# Altium PCB Micron-6b.PcbDoc
Units mm, origin at the board's own origin, x right, y up, seen from the top; angles counter-clockwise.
Board outline 45 x 23 mm, 2 copper layers (Top Layer, Bottom Layer), stack 1.021 mm thick; 80 components, 55 nets, 242 pads, 208 vias.
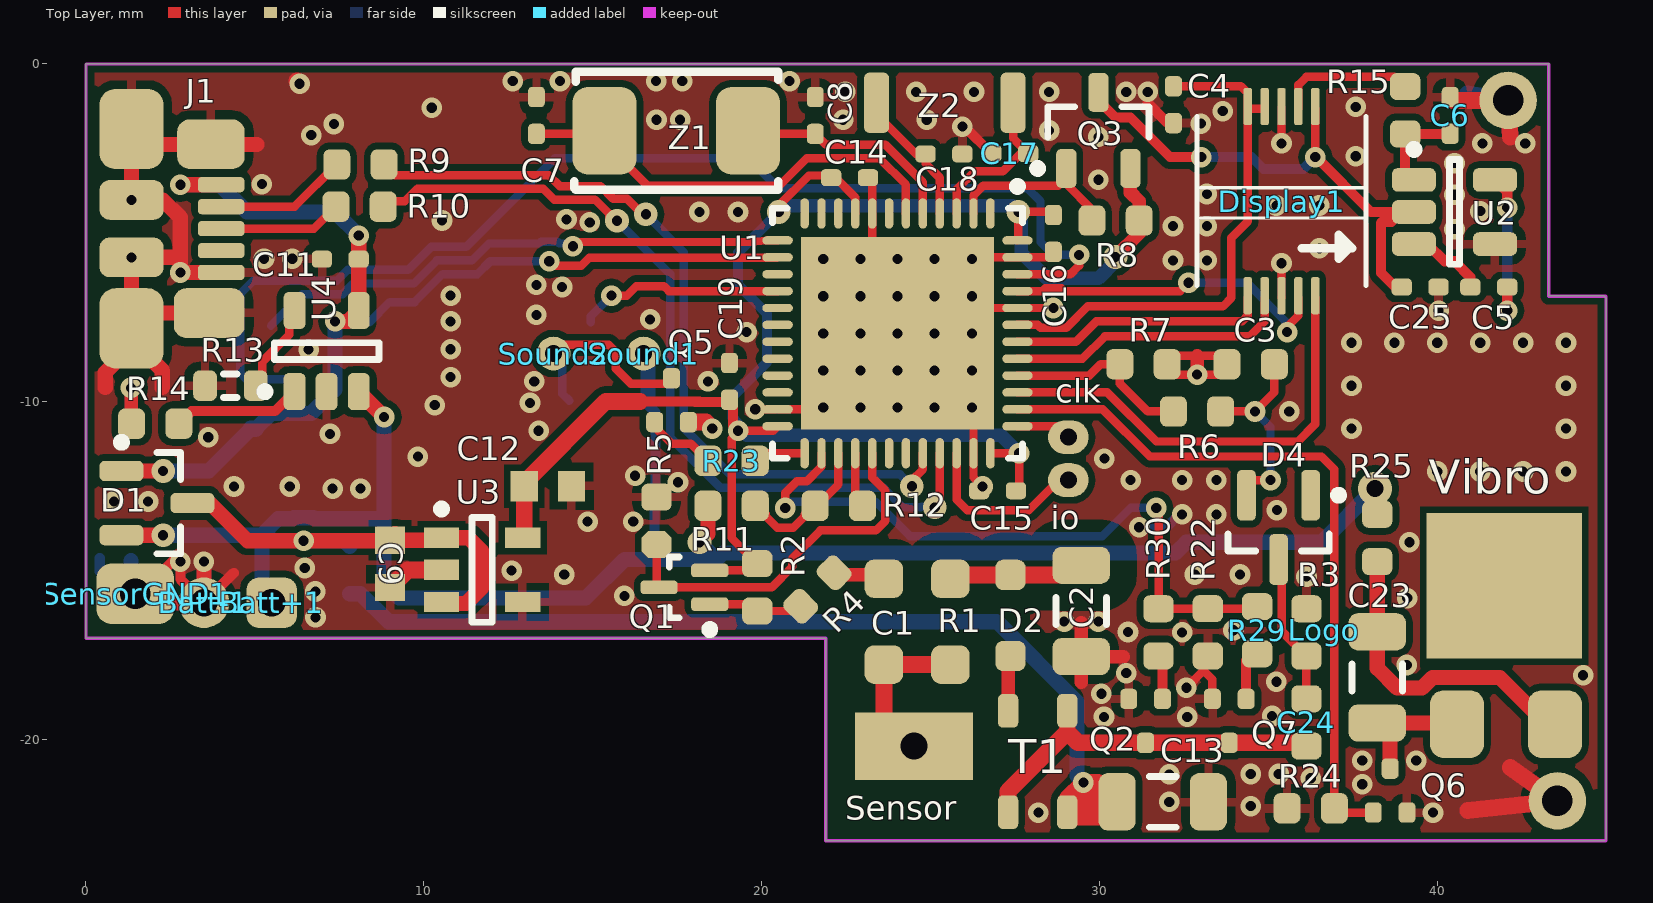
[diagram p0: Top Layer view]
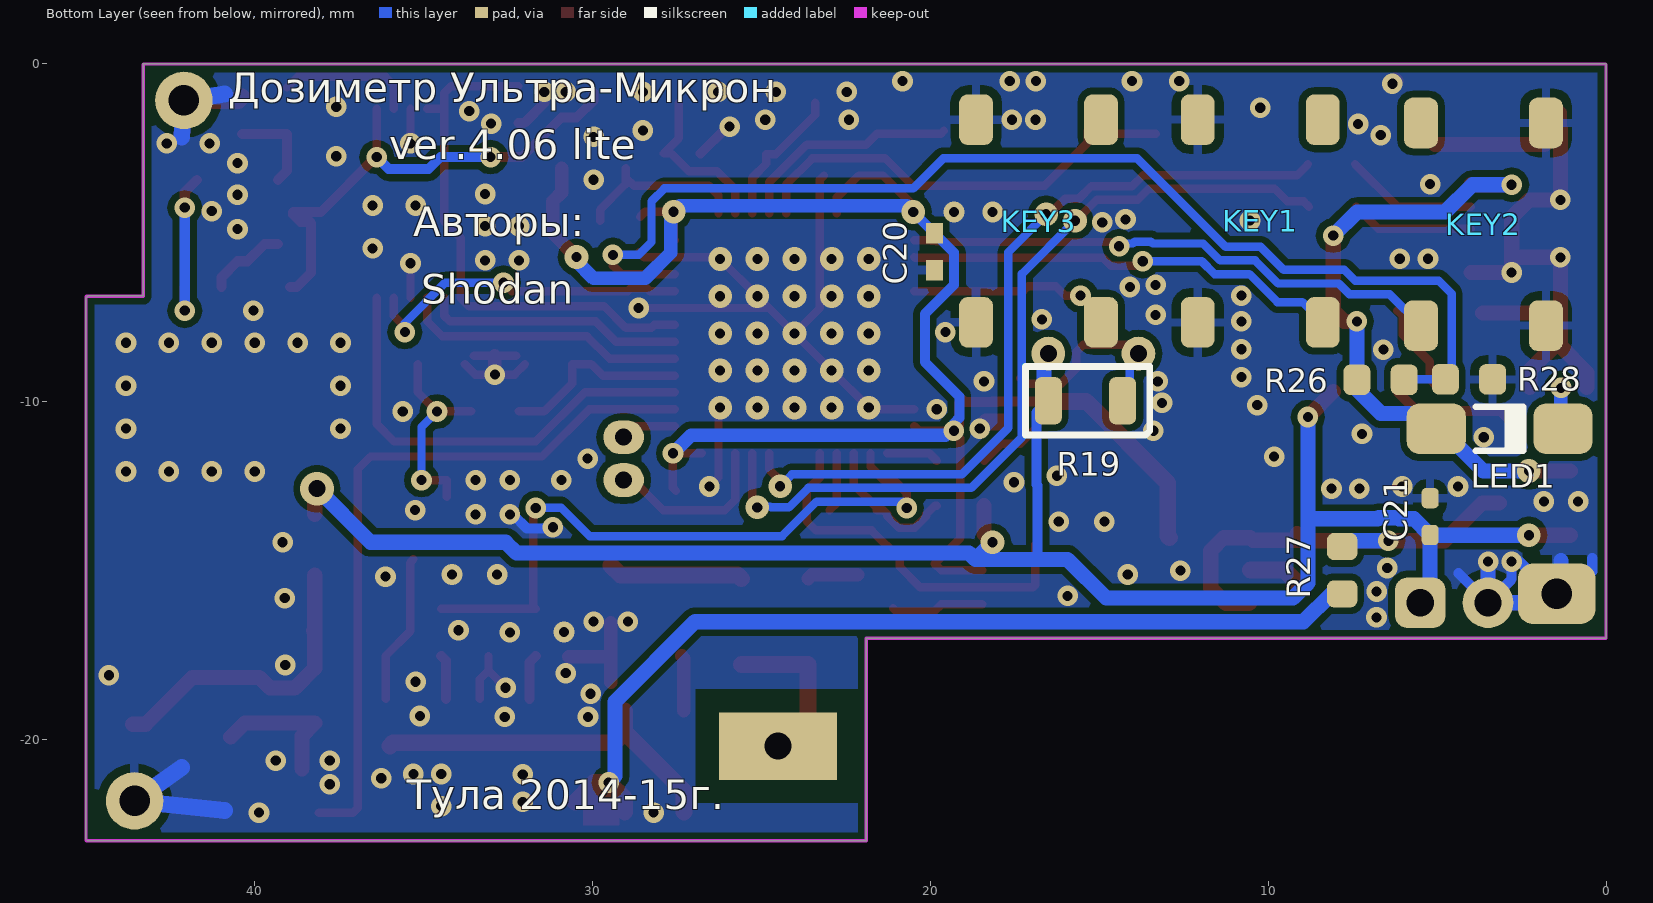
[diagram p1: Bottom Layer view, seen from below]

## Layer stack, top to bottom
Top Solder: solder mask 0.0102, Solder Resist, Dk 3.5
Top Layer: signal copper 0.0356
Dielectric1: dielectric 0.95, FR-4, Dk 4.8
Bottom Layer: signal copper 0.0356
Bottom Solder: solder mask 0.0102, Solder Resist, Dk 3.5

## Board outline
0,0 0,-17 21.882,-17 21.9,-17.018 21.9,-22.993 21.907,-23 44.958,-23 45,-22.958 45,-22.924 45,-6.921 44.958,-6.879 44.958,-6.875 44.941,-6.858 43.307,-6.858 43.307,0

## Design rules (kind name [scope] priority, off if disabled: settings)
AssemblyTestPointUsage SilkToBoardRegionClearance_1 [All] p2:
Clearance Clearance_NetD2_1 [InNet('NetD2_1')] p1: gap=0.7
Clearance Clearance_NetC1_2 [InNet('NetC1_2')] p2: gap=0.7
Clearance Clearance_NetC1_1 [InNet('NetC1_1')] p3: gap=0.6
Clearance Clearance_400V [InNet('+400V')] p4: gap=0.8
Clearance Clearance_poly [InPolygon] p5: gap=0.2
Clearance [All] p6: gap=0.152
MatchedLengths DiffPair_DIFF100MatchedLengths [InDifferentialPairClass('DIFF100')] p1: tolerance=0.152 checknetsindiffpair=TRUE checkdiffpairvsdiffpair=FALSE checkothers=FALSE
MinimumAnnularRing [All] p1: minimumring=0.152
MinimumSolderMaskSliver SilkscreenOverComponentPads_1 [All] p1: minsoldermaskwidth=0.254
MinimumSolderMaskSliver SilkToSolderMaskClearance [IsPad] p2: minsoldermaskwidth=0.254
MinimumSolderMaskSliver [All] p3: minsoldermaskwidth=0.254
MinimumSolderMaskSliver SilkscreenOverComponentPads_2 [All] p4: minsoldermaskwidth=0.254
PolygonConnect PolygonConnect_via [IsVia] p1: connectstyle=Direct reliefconductorwidth=0.254 reliefentries=4 polygonreliefangle="90 Angle" airgapwidth=0.254
PolygonConnect [All] p2: connectstyle=Relief reliefconductorwidth=0.254 reliefentries=4 polygonreliefangle="90 Angle" airgapwidth=0.254
RoutingVias [All] p1: holewidth=0.305 width=0.635 viastyle="Through Hole" minholewidth=0.305 minwidth=0.635 maxholewidth=0.711 maxwidth=1.27
ShortCircuit ShortCircuit_1 [All] p1: allowed=FALSE
ShortCircuit [All] p2: allowed=FALSE
SilkToBoardRegionClearance SilkToBoardRegionClearance_2 [All] p1:
SilkToBoardRegionClearance [All] p2:
SilkToSilkClearance [All] p1: silktosilkclearance=0.152
SilkToSolderMaskClearance SilkToSolderMaskClearance_1 [IsPad] p1: minsilkscreentomaskgap=0.254 clearancetoexposedcopper=TRUE
SilkToSolderMaskClearance SilkscreenOverComponentPads [IsPad] p2: minsilkscreentomaskgap=0.1 clearancetoexposedcopper=TRUE
SolderMaskExpansion [All] p1: expansion=0.102
Width [All] p1: maxlimit=2.54 minlimit=0.152 preferedwidth=0.254
25 further rules are at their usual default settings.

## Components (designator, comment, footprint, x,y, rotation, side; value= is the part's Value field where it differs from the comment)
Batt+1 "" "SENSOR CONTACT"#1 5.125,-17.725 r90 top
Batt-1 "" "SENSOR CONTACT"#2 3.492,-15.95 r90 top
C1 "10pF 1kV" "0805 SW-2012 STD" 23.622,-14.986 r270 top
C2 "10nF 600V" C1206 29.464,-16.192 r90 top
C3 "470pF" 1608[0603]#1 34.48,-8.89 r180 top
C4 "100nF" "0402 AVX"#1 32.194,-1.206 r0 top
C5 "1uF" "0402 AVX"#1 41.529,-6.604 r270 top
C6 "1uF" "0402 AVX"#1 40.386,-1.524 r0 top
C7 "18pF" "0402 AVX"#1 13.335,-1.524 r0 top
C8 "18pF" "0402 AVX"#1 21.59,-1.524 r180 top
C9 "1uF" 1608[0603]#2 9,-14.8 r90 top
C11 "1uF" "0402 AVX"#1 7.53,-5.779 r90 top
C12 "1uF" 1608[0603]#2 13.675,-12.5 r180 top
C13 "10uF" C1206 31.877,-21.844 r180 top
C14 "100nF" "0402 AVX"#2 22.606,-3.365 r270 top
C15 "100nF" "0402 AVX"#1 26.987,-12.636 r270 top
C16 "100nF" "0402 AVX"#1 28.639,-5.016 r0 top
C17 "10pF" "0402 AVX"#1 27.35,-2.65 r90 top
C18 "10pF" "0402 AVX"#1 25.4,-2.667 r270 top
C19 "100nF" "0402 AVX"#1 19.05,-9.398 r180 top
C20 "1uF" "0402 AVX"#3 19.875,-5.56 r180 bottom
C21 "1uF" "0402 AVX"#1 5.207,-13.399 r180 bottom
C23 "4u7" C1206 38.227,-18.161 r90 top
C24 "33nF" 1608[0603]#1 36.131,-19.494 r90 top
C25 "100nF" "0402 AVX"#1 39.497,-6.604 r90 top
clk "" "SENSOR CONTACT"#3 29.083,-11.049 r90 top
D1 "BAR43C" SOT23_N 2.1,-13 r0 top
D2 "DA2JF8100L" DA2JF8100L 27.368,-17.526 r90 top
D4 "BAV99" SOT23-3 35.306,-13.718 r270 top
Display1 "Nokia 2760" DF23C-10DS-0.5V 32.893,-1.46 r90 top
io "" "SENSOR CONTACT"#3 29.083,-12.319 r90 top
J1 "Micro-USB" 47346-0001 4.75,-4.875 r270 top
KEY1 "Menu" IT-1187-160GM-G 12.087,-1.65 r270 bottom locked
KEY2 "UP" IT-1187-160GM-G 1.778,-7.747 r90 bottom
KEY3 "DOWN" IT-1187-160GM-G 18.65,-1.65 r270 bottom locked
LED1 "KPTD-3216SECK" KPTD-3216SECK 3.15,-10.8 r0 bottom
Logo "" "Logo Micron" 36.639,-16.764 r0 top
Q1 "BC857CT" SOT416_N 17.716,-15.494 r180 top
Q2 "RUM002N05T2L" PMR400UN 31.369,-18.796 r90 top
Q3 "IRLML6401" Micro3_N 29.972,-1.968 r90 top
Q5 "RUM002N05T2L" PMR400UN 17.335,-10.604 r270 top
Q6 "RUM002N05T2L" PMR400UN 38.608,-22.162 r270 top
Q7 "RUM002N05T2L" PMR400UN 33.846,-18.796 r90 top
R1 "10M 400V" "0805 SW-2012 STD" 25.59,-18.034 r90 top
R2 "1.5k" 1608[0603]#1 19.875,-15.494 r270 top
R3 "10k" 1608[0603]#1 36.131,-16.828 r270 top
R4 "10K" 1608[0603]#1 21.653,-15.557 r225 top
R5 "10k" 1608[0603]#3 16.891,-13.525 r90 top
R6 "33K" 1608[0603]#1 32.893,-10.287 r180 top
R7 "1k" 1608[0603]#1 31.305,-8.89 r180 top
R8 "10k" 1608[0603]#1 30.48,-4.635 r0 top
R9 "22R" 1608[0603]#1 8.125,-2.975 r180 top
R10 "22R" 1608[0603]#1 8.1,-4.225 r180 top
R11 "10k" 1608[0603]#1 19.113,-13.081 r180 top
R12 "10k" 1608[0603]#1 22.288,-13.081 r180 top
R13 "62K" J1-0603 4.275,-9.525 r0 top
R14 "470R" 1608[0603]#1 2.05,-10.65 r180 top
R15 "1R" 1608[0603]#1 39.052,-1.369 r270 top
R19 "360R" RESISTOR 15.41,-9.97 r180 bottom
R22 "10K" 1608[0603]#1 33.211,-16.826 r90 top
R23 "1k" 1608[0603]#1 19.113,-11.747 r0 top
R24 "10k" 1608[0603]#1 36.258,-22.034 r0 top
R25 "15R" 1608[0603]#1 38.227,-14.034 r270 top
R26 "1k" 1608[0603]#1 6.675,-9.35 r0 bottom
R27 "22R" 1608[0603]#1 7.81,-14.986 r270 bottom
R28 "1.5k" 1608[0603]#1 4.056,-9.335 r180 bottom
R29 "0R" 1608[0603]#1 34.671,-16.764 r90 top
R30 "0R" 1608[0603]#1 31.75,-16.828 r90 top
Sensor "" "Sensor contact" 24.511,-20.193 r90 top
SensorGND1 "" "SENSOR CONTACT"#4 1.46,-15.684 r180 top
Sound1 "" "SENSOR CONTACT"#5 16.51,-8.572 r90 top
Sound2 "" "SENSOR CONTACT"#5 13.843,-8.572 r90 top
T1 "ATB322515-0110" ATB322515-0110 27.3,-22.15 r90 top
U1 "STM32L152CBU6" UFQFPN48_M 24.025,-7.975 r270 top
U2 "TPS60400DBV" SOT-23-OT5_M 40.513,-4.381 r0 top
U3 "TPS78330DDCR" TI-DDC5_N 11.725,-14.975 r0 top
U4 "MCP73831T-2ACI/OT" SOT-23-OT5_N 7.125,-8.5 r90 top
Vibro "Motor" "Vibro 4hobby" 39.688,-13.144 r270 top
Z1 "8MHZ" 8MHZ 16.9,-1.875 r180 top
Z2 "32,768 KHz" ABS10 22.975,-0.25 r0 top

## Footprints (in the part's own frame and the unit in brackets; to place one, negate y for a bottom-side part, rotate by r counter-clockwise, add the part's x,y. Pads: shape width x height; smd on the part's side, far side on the other; paste and mask are expansions set on the pad)
8MHZ [mm]
  rrect50% 1.9x2.6 smd: 1(-2.7,0.1) 2(1.55,0.1)
  silkscreen extent -3.6,-1.65 2.45,1.85, body extent -3.6,-1.65 2.4,1.85, height 1.4
"0402 AVX"#1 [mm]
  rrect50% 0.5x0.6 smd: 1(0,0.545) 2(0,-0.545)
  body extent -0.25,-0.48 0.25,0.52, height 0.56
"0402 AVX"#2 [mm]
  rrect50% 0.5x0.6 smd: 1(0,-0.545) 2(0,0.545)
  body extent -0.25,-0.52 0.25,0.48, height 0.56
"0402 AVX"#3 [mm]
  rect 0.5x0.6 smd: 1(0,0.545) 2(0,-0.545)
  body extent -0.25,-0.48 0.25,0.52, height 0.56
"0805 SW-2012 STD" [mil] "Chip Capacitor, 2-Leads, Body 1,00x0,50mm, IPC Medium Density"
  rrect50% 45x45 smd: 1(10,0) 2(110,0)
  body extent 18,-20 103,20, height 39
1608[0603]#1 [mm] "Chip Capacitor, Body 1.6x0.8mm, IPC High Density"
  rrect50% 0.8x0.9 smd: 1(-0.7,0) 2(0.7,0)
  body extent -0.87,-0.48 0.87,0.48, height 1.3
1608[0603]#2 [mm] "Chip Capacitor, Body 1.6x0.8mm, IPC High Density"
  rect 0.8x0.9 smd: 1(-0.7,0) 2(0.7,0)
  body extent -0.87,-0.48 0.87,0.48, height 1.3
1608[0603]#3 [mm] "Chip Capacitor, Body 1.6x0.8mm, IPC High Density"
  oct 0.8x0.9 smd: 1(-0.7,0)
  rrect50% 0.8x0.9 smd: 2(0.7,0)
  body extent -0.87,-0.48 0.87,0.48, height 1.3
47346-0001 [mm] "Molex Mico-USB"
  rrect50% 0.45x1.38 smd: 1(-1.3,-0.75) 2(-0.65,-0.75) 3(0,-0.75) 4(0.65,-0.75) 5(1.3,-0.75)
  rrect50% 1.475x2 smd: MH1(-2.5,-1.05)
  rrect50% 1.475x2.1 smd: MH2(2.5,-1.1)
  rrect50% 2.375x1.9 smd: MH3(-2.95,-3.4) MH4(2.95,-3.4)
  rrect50% 1.175x1.9 smd: MH3(-0.85,-3.4) MH4(0.85,-3.4)
  body extent -3.95,-5.52 4.03,-0.09, height 2.77
ABS10 [mm]
  rrect50% 0.75x1.8 smd: 1(0.43,-0.9) 2(4.47,-0.9)
  body extent 0,-1.8 4.9,0, height 1
ATB322515-0110 [mm]
  rrect50% 1x0.6 smd: 1(0,-1.75) 2(0,0) 3(3,0) 4(3,-1.75)
  body extent -0.1,-2.15 3.1,0.35, height 1.55
C1206 [mm] "Chip Capacitor, Body 3.2x1.6mm, IPC High Density"
  rrect50% 1.1x1.7 smd: 1(-1.35,0) 2(1.35,0)
  silkscreen extent -0.4,-0.75 0.4,0.75, body extent -1.7,-0.9 1.7,0.9, height 1.3
DA2JF8100L [mm]
  rrect50% 0.9x0.9 smd: 1(0,0) 2(2.4,0)
  body extent 0.36,-0.65 2.06,0.6, height 0.7
DF23C-10DS-0.5V [mm]
  rrect50% 1.1x0.25 smd: 1(-5.4,-1.5) 2(-5.4,-2) 3(-5.4,-2.5) 4(-5.4,-3) 5(-5.4,-3.5) 6(0.2,-3.5) 7(0.2,-3) 8(0.2,-2.5) 9(0.2,-2) 10(0.2,-1.5)
  silkscreen extent -5.1,-5 -0.1,0, body extent -5.1,-5 -0.1,0, height 1.4
IT-1187-160GM-G [mm]
  rrect50% 1.5x1 smd: 3(0,0) 3(6,0) 4(0,3.7) 4(6,3.7)
  body extent 0.4,-0.7 5.6,4.5, height 1.5
J1-0603 [mm] "Chip Resistor, Body 1.6x0.8mm, IPC High Density"
  rrect50% 0.7x0.9 smd: 1(-0.75,0) 2(0.75,0)
  silkscreen extent -0.2,-0.35 0.2,0.35, body extent -0.85,-0.48 0.85,0.48, height 0.9
KPTD-3216SECK [mm] "Chip Capacitor, 2-Leads, Body 3,2x1,6mm, IPC Medium Density"
  rrect50% 1.75x1.5 smd: 1(-1.875,0) 2(1.875,0)
  silkscreen extent -0.7,-0.65 0.7,0.65, body extent -1.6,-0.8 1.6,0.8, height 1.8
"Logo Micron" [mm]
Micro3_N [mm] "SOT23, 3-Leads, Body 2.9x1.3mm, Pitch 0.95mm, Lead Span 2.3mm, IPC Medium Density"
  rrect50% 1.15x0.6 smd: 1(-1.125,0.95) 2(-1.125,-0.95) 3(1.125,0)
  silkscreen extent -1.25,-1.5 0.7,1.92, body extent -0.7,-1.5 0.7,1.5, height 1.12
PMR400UN [mm]
  rrect50% 0.6x0.5 smd: 1(0,-0.5) 2(0,0.5) 3(-1.3,0)
  body extent -1.15,-0.9 -0.25,0.9, height 0.95
RESISTOR [mm]
  rrect50% 0.8x1.4 smd: 1(-1.1,0) 2(1.1,0)
  silkscreen extent -1.78,-1.02 1.91,1.02, body extent -1.1,-0.7 1.2,0.7, height 1
"SENSOR CONTACT"#1 [mm]
  rrect50% 1.5x1.5 hole 0.8: 1(1.775,-0.375)
"SENSOR CONTACT"#2 [mm]
  round 1.5 hole 0.8: 1(0,0)
"SENSOR CONTACT"#3 [mm]
  oval 1x1.2 hole 0.5: 1(0,0)
"SENSOR CONTACT"#4 [mm]
  rrect50% 2.3x1.8 hole 0.9: 1(0,0)
"SENSOR CONTACT"#5 [mm]
  round 1 hole 0.5: 1(0,0)
"Sensor contact" [mm]
  rect 2x3.5 hole 0.8: 1(0,0)
SOT23-3 [mm] "SOT23, 3-Leads, Body 2,90x2,45mm, Pitch 0,95mm, IPC Medium Density"
  rrect50% 1.5x0.55 smd: 1(-0.95,0.95) 2(-0.95,-0.95) 3(0.95,0)
  silkscreen extent -1.07,-1.5 0.7,1.9, body extent -0.7,-1.5 0.7,1.5, height 1.1
SOT23_N [mm] "SOT23, 3-Leads, Body 2.9x1.3mm, Pitch 0.95mm, Lead Span 2.3mm, IPC Medium Density"
  rrect50% 1.3x0.6 smd: 1(-1.05,0.95) 2(-1.05,-0.95) 3(1.05,0)
  silkscreen extent -1.17,-1.5 0.7,1.92, body extent -0.7,-1.5 0.7,1.5, height 1.1
SOT416_N [mm] "SOT416, 3-Leads, Body 1.6x0.8mm, Pitch 0.50mm, Lead Span 1.6mm, IPC Medium Density"
  rrect50% 1.1x0.4 smd: 1(-0.75,0.5) 2(-0.75,-0.5) 3(0.75,0)
  silkscreen extent -0.87,-0.9 0.45,1.37, body extent -0.45,-0.9 0.45,0.9, height 0.95
SOT-23-OT5_M [mm] "SOT23, 5-Leads, Body 2.9x1.6mm, Pitch 0.95mm, Lead Span 2.7mm, IPC Low Density"
  rrect50% 1.3x0.7 smd: 1(-1.2,0.95) 2(-1.2,0) 3(-1.2,-0.95) 4(1.2,-0.95) 5(1.2,0.95)
  silkscreen extent -1.32,-1.55 0.15,1.97, body extent -0.9,-1.55 0.9,1.55, height 1.45
SOT-23-OT5_N [mm] "SOT23, 5-Leads, Body 2.9x1.6mm, Pitch 0.95mm, Lead Span 2.7mm, IPC Medium Density"
  rrect50% 1.1x0.65 smd: 1(-1.2,0.95) 2(-1.2,0) 3(-1.2,-0.95) 4(1.2,-0.95) 5(1.2,0.95)
  silkscreen extent -1.32,-1.55 0.25,1.95, body extent -0.9,-1.55 0.9,1.55, height 1.45
TI-DDC5_N [mm] "SOT23, 5-Leads, Body 2.9x1.6mm, Pitch 0.95mm, IPC Medium Density"
  rect 1.05x0.6 smd: 1(-1.2,0.95) 2(-1.2,0) 3(-1.2,-0.95) 4(1.2,-0.95) 5(1.2,0.95)
  silkscreen extent -1.32,-1.55 0.3,1.92, body extent -0.87,-1.52 0.87,1.53, height 1.1
UFQFPN48_M [mm] "QFN, 48-Leads, Body 7x7mm, Pitch 0.5mm, Thermal Pad 5.6x5.6mm, IPC Low Density"
  oval 0.9x0.25 smd: 1(-3.55,2.75) 2(-3.55,2.25) 3(-3.55,1.75) 4(-3.55,1.25) 5(-3.55,0.75) 6(-3.55,0.25) 7(-3.55,-0.25) 8(-3.55,-0.75) 9(-3.55,-1.25) 10(-3.55,-1.75) 11(-3.55,-2.25) 12(-3.55,-2.75) 25(3.55,-2.75) 26(3.55,-2.25) 27(3.55,-1.75) 28(3.55,-1.25) 29(3.55,-0.75) 30(3.55,-0.25) 31(3.55,0.25) 32(3.55,0.75) 33(3.55,1.25) 34(3.55,1.75) 35(3.55,2.25) 36(3.55,2.75)
  oval 0.25x0.9 smd: 13(-2.75,-3.55) 14(-2.25,-3.55) 15(-1.75,-3.55) 16(-1.25,-3.55) 17(-0.75,-3.55) 18(-0.25,-3.55) 19(0.25,-3.55) 20(0.75,-3.55) 21(1.25,-3.55) 22(1.75,-3.55) 23(2.25,-3.55) 24(2.75,-3.55) 37(2.75,3.55) 38(2.25,3.55) 39(1.75,3.55) 40(1.25,3.55) 41(0.75,3.55) 42(0.25,3.55) 43(-0.25,3.55) 44(-0.75,3.55) 45(-1.25,3.55) 46(-1.75,3.55) 47(-2.25,3.55) 48(-2.75,3.55)
  rect 5.7x5.7 smd: 49(0,0)
  silkscreen extent -4.47,-3.7 3.7,3.7, body extent -3.55,-3.55 3.55,3.55, height 0.6
"Vibro 4hobby" [mm] "EBAY zxdima"
  rrect50% 2x1.6 smd: 1(6.4,3.8) 2(6.4,0.9)
  rect 4.3x4.6 smd: GND(2.3,2.3)
  body extent -3.95,0 7.4,4.7, height 5

## Part data
Batt+1 Batt-1 clk io Logo Sensor SensorGND1 Sound1 Sound2: library part Plug, "Plug"
C1 C2 C3 C4 C5 C6 C7 C8 C11 C13 C14 C15 C16 C17 C18 C19 C20 C21 C24 C25: library part "Cap Semi", "Capacitor (Semiconductor SIM Model)"
C9 C12 C23: library part CAPACITOR, "Capacitor (Semiconductor SIM Model)"
D1: library part BAT54C, "Schottky Barrier Double Diode"
D2: library part Diode, "Default Diode"
D4: "Silicon Switching Diode Array for High-Speed Switching"
J1: library part 0481900001, "USB On-The-Go (OTG) Mini-B Receptacle, Right Angle, SMT, 0.80mm (.031\") Pitch, Solder Tabs with Back Cover, Recessed Type"
KEY1 KEY2 KEY3: library part Micro_key_smd
Q1: "PNP General-purpose Transistor"
Q2 Q5 Q6 Q7: library part IRLML2402, "HEXFET Power MOSFET"
Q3: "HEXFET Power MOSFET"
R1 R2 R3 R4 R5 R6 R7 R8 R9 R10 R11 R12 R14 R15 R19 R22 R23 R24 R25 R26 R27 R28 R29 R30: library part "Resistor 0805"
R13: library part Res3, "Resistor"
U2: library part TPS60400
U3: "Single Output LDO, 150 mA, Fixed 3 V Output, 2.2 to 5.5 V Input, with Ultra-Low IQ, 5-pin SOT (DDC), -40 to 105 degC, Green (RoHS & no Sb/Br)"
U4: "Miniature Single-Cell, Fully Integrated Li-Ion, Li-Polymer Charge Management Controller, 4.2V, 5-Pin SOT-23, Industrial Temperature, Tape and Reel"
Vibro: "Motor, General Kind"
Z2: library part 8MHZ

## Free pads (board coordinates)
  round 1.7 hole 0.9: 0(42.1,-1.079) 0(43.561,-21.816)

## Via types
v1: diameter 0.61, hole 0.3, Top Layer to Bottom Layer, tented both sides, 172 vias
v2: diameter 0.7, hole 0.3, Top Layer to Bottom Layer, tented both sides, 35 vias
v3: diameter 1, hole 0.5, Top Layer to Bottom Layer, tented both sides, 1 vias

## Nets (pads, with @x,y where several pads share a name; then routed paths per layer and width w, separated by ;. In a path a pad name is that pad's centre, name@x,y a point inside that pad or via, vN(x,y) a via of type N, cw(c..) or ccw(c..) an arc to the next point about the centre after c; other vN are vias at no path point)
+3V: C12.2 C14.1 C15.1 C16.1 C19.1 C20.1 Q1.2 Q3.2 R2.1 R8.2 U1.9 U1.24 U1.36 U1.48 U3.5 | length 55.1
  Top Layer w0.25: Q1.2 19.676,-14.994 R2.1 19.113,-14.032 v1@19.113,-11.078 ; v1(19.304,-10.858) 20.341,-10.858 U1.24 ; v2(20.511,-4.381) 20.511,-4.191 21.4,-3.302 22.124,-3.302 22.775,-3.952 U1.9 ; U1.36 v1(27.622,-11.525) 27.622,-12.547 C15.1 ; U1.48 27.601,-5.199 v2(27.601,-4.375) 28.445,-4.375 C16.1@28.59,-4.52
  Top Layer w0.3: 16.405,-9.989 18.014,-9.989 18.025,-10 18.158,-10 18.163,-10.005 18.988,-10.005 C19.1 19.149,-10.042 19.149,-10.704 v1(19.304,-10.858)
  Top Layer w0.4: v2(30.48,-5.715) 31.18,-5.015 R8.2 31.18,-4.066 30.922,-3.807 Q3.2
  Top Layer w0.5: U3.5 12.975,-13.975 C12.2 12.975,-12.4 15.386,-9.989 16.405,-9.989
  Bottom Layer w0.3: v1(19.304,-10.858) 19.304,-10.635 19.143,-10.474 19.143,-9.844 20.165,-8.822 20.165,-7.402 19.304,-6.54 19.304,-5.588 v2(20.511,-4.381)
  Bottom Layer w0.4: v1@19.558,-10.986 27.083,-10.986 v1(27.622,-11.525) ; v2(20.511,-4.381) 20.701,-4.191 27.417,-4.191 v2(27.601,-4.375) 27.686,-4.46 27.686,-5.588 28.448,-6.35 29.972,-6.35 30.48,-5.842 v2(30.48,-5.715)
+5: C11.2 D1.1 J1.1 LED1.2 R26.2 U4.4 | length 19.5
  Top Layer w0.45: D1.1 v2(2.286,-12.05) ; v1(2.794,-3.575) J1.1 ; v1(7.375,-7.62) 7.755,-7.62 U4.4 C11.2 v1(8.075,-5.08)
  Bottom Layer w0.45: v2(2.286,-12.05) 3.635,-12.05 LED1.2@4.884,-10.8 ; v1(2.794,-3.575) 3.956,-3.575 4.763,-4.381 7.376,-4.381 v1(8.075,-5.08) ; LED1.2 5.475,-10.351 6.667,-10.351 7.375,-9.643 R26.2 v1(7.375,-7.62)
  Bottom Layer w0.5: LED1.2@4.884,-10.8 LED1.2
+400V: C2.2 D2.2 R1.2 | length 4
  Top Layer w0.5: R1.2 25.705,-15.126 D2.2 29.181,-15.126 C2.2
+DATA: J1.3 R10.2 | length 3.7
  Top Layer w0.25: J1.3 6.75,-4.875 R10.2
+LED: C25.1 Display1.6 Q3.3 U2.2 | length 15.2
  Top Layer w0.25: Display1.6@36.393,-1.324 v1(36.393,-2.757) v1@36.418,-2.757
  Top Layer w0.3: Q3.3 29.972,-1.079 30.48,-1.587 30.924,-1.587 32.094,-2.757 32.195,-2.757 v1(33.02,-2.757) ; v1@36.418,-2.757 38.043,-4.381 38.862,-4.381 38.862,-4.458 38.641,-4.679 38.361,-4.679 38.335,-4.704 38.335,-6.184 38.756,-6.604 C25.1
  Bottom Layer w0.3: v1(33.02,-2.757) 34.507,-2.757 34.861,-3.111 36.039,-3.111 v1(36.393,-2.757)
-3V: Display1.7 R15.1 | length 4.1
  Top Layer w0.25: Display1.7@35.893,-1.324 35.893,-0.619 36.131,-0.381 38.737,-0.381 R15.1@39.053,-0.697
-DATA: J1.2 R9.2 | length 3.9
  Top Layer w0.25: J1.2 6.175,-4.225 R9.2
BAT: Batt+1.1 C21.2 D1.2 R11.2 R19.1 R25.1 Sound1.1 U4.3 | length 56
  Top Layer w0.45: D1.2 v2(2.286,-13.95) ; U4.3 v1(8.826,-10.452) ; v2(18.161,-14.16) 18.413,-13.908 R11.2 ; v3(38.163,-12.573) 38.227,-12.637 R25.1
  Bottom Layer w0.3: R19.1 16.863,-10.323 16.863,-12.444 16.828,-12.479 16.828,-14.668
  Bottom Layer w0.45: v2(2.286,-13.95) C21.2@5.207,-13.95 ; Batt+1.1 5.207,-15.657 C21.2@5.207,-13.95 ; v1(8.826,-10.452) 8.826,-13.462 ; R19.1 16.637,-9.842 16.637,-8.7 Sound1.1 ; v2(18.161,-14.16) 18.669,-14.668 ; v3(38.163,-12.573) 36.576,-14.16 32.575,-14.16 32.256,-14.48 24.184,-14.48 24.182,-14.478 18.86,-14.478 18.669,-14.668 ; C21.2@5.207,-13.95 C21.2 5.688,-13.462 6.132,-13.462 6.163,-13.431 6.728,-13.431 6.759,-13.462 8.826,-13.462 ; 8.826,-13.462 8.826,-15.367 9.271,-15.811 14.795,-15.811 15.938,-14.668 18.669,-14.668
CLK: clk.1 U1.37 | length 1.6
  Top Layer w0.25: U1.37 28.759,-10.725 clk.1
GND: Batt-1.1 C2.1 C3.2 C4.2 C6.1 C7.1 C8.2 C9.1 C11.1 C12.1 C13.1 C14.2 C15.2 C16.2 C17.1 C18.1 C19.2 C20.2 C21.1 C25.2 Display1.3 Display1.8 J1.5 J1.MH1 J1.MH2 J1.MH3 J1.MH4 KEY1.3 KEY2.3 KEY3.3 pad.0 Q2.2 Q5.2 Q6.2 Q7.2 R3.1 R5.2 R7.1 R13.1 R22.1 R24.1 R28.2 SensorGND1.1 U1.8 U1.23 U1.35 U1.44 U1.47 U1.49 U2.4 U3.2 U3.4 U4.2 | length 93.7
  Top Layer w0.25: U1.23 21.775,-10.225 v2(21.825,-10.175) v2(22.925,-9.075) v2(24.025,-7.975) ; C14.2@23.151,-3.302 23.275,-3.426 U1.8 23.275,-7.225 v2(24.025,-7.975) ; U1.49@26.275,-10.225 U1.35 26.275,-12.241 v1(26.543,-12.509) ; C16.2@28.625,-5.575 28.475,-5.725 U1.47 26.275,-5.725 v2(26.225,-5.775) v2(25.125,-6.875) U1.49@24.775,-7.225 ; v1(28.639,-7.225) U1.44 U1.49@24.775,-7.225 ; R7.1 32.31,-9.195 v1(32.893,-9.195) 33.476,-9.195 C3.2 ; R7.1@32.26,-8.636 32.893,-8.636 C3.2@33.526,-8.636 ; v1(32.575,-18.466) 33.084,-17.958 ; R22.1@33.084,-17.526 33.084,-17.958 ; Q7.2 33.345,-18.22 33.084,-17.958 ; Display1.3@35.393,-6.924 v1(35.393,-5.899) ; v1(35.393,-2.349) Display1.8@35.393,-1.324 ; v2(24.025,-7.975) U1.49@24.775,-7.225
  Top Layer w0.3: SensorGND1.1@1.333,-15.95 v1@2.552,-14.732 ; v1(2.794,-14.732) 2.794,-15.252 Batt-1.1 4.378,-15.065 ; v1(25.946,-1.854) 26.009,-1.854 C17.1 ; v1(31.432,-0.826) 31.432,-1.156 32.028,-1.751 C4.2
  Top Layer w0.4: J1.MH3@1.35,-1.925 J1.MH3@1.35,-1.447 ; v1@28.511,-2.069 v1(28.511,-1.968) ; 29.464,-18.31 C2.1 ; 29.464,-16.542 C2.1 ; 30.708,-17.542 C2.1 ; v1(32.893,-9.195) 32.893,-8.636
  Top Layer w0.45: 0.572,-9.576 0.572,-9.131 1.35,-8.353 J1.MH4@1.35,-7.825 ; SensorGND1.1@1.333,-15.95 Batt-1.1 v1@3.492,-14.77 ; 2.261,-9.576 2.261,-9.08 1.35,-8.17 J1.MH4@1.35,-7.825 ; 2.791,-5.725 v1(1.35,-5.725) J1.MH4@1.35,-7.825 ; J1.MH2 1.8,-7.375 J1.MH4@1.35,-7.825 ; J1.5 v1(2.794,-6.175) 2.794,-4.547 2.272,-4.025 v1(1.35,-4.025) 1.35,-1.925 1.812,-2.387 3.7,-2.387 5.066,-2.387
  Top Layer w0.5: v1@6.248,-0.508 v1(6.325,-0.584) ; C9.1 9.525,-14.975 U3.2 ; Q5.2 18.351,-10.604 v1(18.542,-10.795) ; C6.1 40.487,-1.079 42.1,-1.079 42.164,-2.159 ; 40.907,-22.098 pad.0@43.561,-21.816 ; 42.164,-20.828 pad.0@43.561,-21.816 ; pad.0@43.434,-22.098 pad.0@43.561,-21.816
  Bottom Layer w0.3: 0.406,-14.63 0.406,-15.023 1.333,-15.95 2.552,-14.732 v1(2.794,-14.732) 2.794,-15.252 Batt-1.1 4.368,-15.075 ; v1(31.178,-13.716) 31.219,-13.756 31.939,-13.756 32.36,-13.335 v1(32.448,-13.335)
  Bottom Layer w0.45: 1.333,-14.707 1.333,-15.95 Batt-1.1 v1@3.492,-14.77
  Bottom Layer w0.5: 40.894,-22.098 pad.0@43.561,-21.816 ; 40.894,-0.889 42.1,-1.079 42.164,-2.159 ; 42.164,-20.828 pad.0@43.561,-21.816 ; pad.0@43.434,-22.098 pad.0@43.561,-21.816
  other v1: 28.194,-22.162 39.878,-22.162 34.48,-21.971 32.067,-21.844 37.782,-21.323 36.258,-21.145 32.067,-21.031 34.48,-21.018 35.306,-21.018 37.782,-20.625 39.383,-20.625 30.137,-19.329 32.601,-19.329 35.115,-19.304 30.061,-18.644 35.242,-18.288 44.323,-18.098 30.797,-18.034 39.099,-17.794 32.448,-16.828 30.848,-16.815 33.972,-16.764 28.956,-16.51 29.972,-16.51 6.794,-16.383 39.116,-15.811 15.938,-15.748 6.792,-15.617 36.131,-15.176 14.16,-15.113 32.829,-15.113 34.163,-15.113 12.6,-15 6.477,-14.922 3.492,-14.732 39.179,-14.16 14.85,-13.55 16.2,-13.55 33.465,-13.335 35.255,-13.208 0.826,-12.954 1.841,-12.954 7.302,-12.573 8.128,-12.573 4.381,-12.509 6.032,-12.509 17.526,-12.383 30.924,-12.319 32.448,-12.319 33.465,-12.319 16.256,-12.192 40.005,-12.065 41.275,-12.065 42.545,-12.065 43.815,-12.065 30.15,-11.684 9.825,-11.625 3.619,-11.049 7.225,-10.95 13.399,-10.858 37.465,-10.795 43.815,-10.795 35.623,-10.287 19.812,-10.223 10.325,-10.1 13.144,-10.033 37.465,-9.525 43.815,-9.525 13.271,-9.398 18.415,-9.398 10.795,-9.271 6.591,-8.458 10.795,-8.445 37.465,-8.255 38.735,-8.255 40.005,-8.255 41.275,-8.255 42.545,-8.255 43.815,-8.255 19.558,-7.938 10.795,-7.62 16.7,-7.563 13.335,-7.429 40.042,-7.302 10.795,-6.858 14.097,-6.604 13.335,-6.54 32.182,-5.817 33.185,-5.817 5.271,-5.766 6.109,-5.766 36.512,-5.461 40.513,-4.889 32.182,-4.801 33.185,-4.801 14.913,-4.688 10.541,-4.635 14.225,-4.6 18.161,-4.381 19.304,-4.381 41.275,-4.356 35.242,-4.191 36.512,-4.191 40.513,-3.873 33.185,-3.848 5.207,-3.556 29.972,-3.429 40.513,-2.934 37.592,-2.73 41.338,-2.349 42.608,-2.349 29.972,-2.159 6.667,-2.108 7.341,-1.778 33.007,-1.765 16.891,-1.651 17.59,-1.651 22.415,-1.651 24.892,-1.651 33.655,-1.397 10.236,-1.295 37.592,-1.27 22.479,-0.826 24.575,-0.826 26.289,-0.826 28.511,-0.826 30.797,-0.826 12.636,-0.508 14.034,-0.508 16.878,-0.508 17.653,-0.508 20.828,-0.508
  other v2: 22.925,-10.175 24.025,-10.175 25.125,-10.175 26.225,-10.175 21.825,-9.075 24.025,-9.075 25.125,-9.075 26.225,-9.075 21.825,-7.975 22.925,-7.975 25.125,-7.975 26.225,-7.975 21.825,-6.875 22.925,-6.875 24.025,-6.875 26.225,-6.875 21.825,-5.775 22.925,-5.775 24.025,-5.775 25.125,-5.775
IO: io.1 U1.34 | length 5.2
  Top Layer w0.25: U1.34 25.775,-12.898 26.085,-13.208 27.915,-13.208 28.804,-12.319 io.1
NetC1_1: C1.1 R4.1 | length 1.5
  Top Layer w0.4: R4.1@22.148,-15.126 23.508,-15.126 C1.1
NetC1_2: C1.2 R1.1 Sensor.1 | length 4.7
  Top Layer w0.5: Sensor.1 23.622,-19.304 C1.2 R1.1
NetC3_1: C3.1 D4.2 R6.1 | length 6.1
  Top Layer w0.25: R6.1 v1(34.607,-10.287) 35.18,-9.714 C3.1 ; D4.2@34.318,-12.817 34.318,-12.319 v1(35.066,-12.319)
  Bottom Layer w0.25: v1(34.607,-10.287) 35.066,-10.746 v1(35.066,-12.319)
NetC4_1: C4.1 Display1.9 Display1.10 U1.43 | length 15.8
  Top Layer w0.25: U1.43 28.175,-7.725 28.258,-7.807 29.023,-7.807 29.654,-7.175 33.655,-7.175 33.909,-6.921 33.909,-5.143 34.393,-4.66 Display1.10@34.393,-1.324 ; C4.1 34.189,-0.661 34.393,-0.865 Display1.10@34.393,-1.324 ; Display1.9@34.893,-1.324 Display1.10@34.393,-1.324
NetC5_1: C5.1 U2.5 | length 4.7
  Top Layer w0.3: U2.5 42.074,-3.792 v1(42.074,-4.255) ; v1(42.074,-7.302) C5.1
  Bottom Layer w0.3: v1(42.074,-7.302) v1(42.074,-4.255)
NetC5_2: C5.2 U2.3 | length 2.4
  Top Layer w0.3: U2.3 39.711,-5.331 40.222,-5.842 40.513,-5.842 40.984,-6.313 C5.2
NetC6_2: C6.2 R15.2 U2.1 | length 2.8
  Top Layer w0.3: U2.1 39.052,-3.171 R15.2 C6.2
NetC7_2: C7.2 U1.6 Z1.2 | length 13.4
  Top Layer w0.25: C7.2 15.256,-2.069 Z1.2 15.35,-2.332 16.618,-3.6 20.53,-3.6 21.336,-2.794 23.495,-2.794 24.275,-3.574 U1.6
NetC8_1: C8.1 U1.5 Z1.1 | length 6.7
  Top Layer w0.25: Z1.1 19.694,-2.069 C8.1 21.913,-2.392 23.664,-2.392 24.775,-3.502 U1.5
NetC13_2: C13.2 R27.2 T1.1 | length 27.6
  Top Layer w0.5: T1.1 29.05,-21.75 v1(29.527,-21.273) 29.956,-21.273 C13.2
  Bottom Layer w0.45: R27.2 8.13,-15.686 8.954,-16.51 26.966,-16.51 29.337,-18.881 29.337,-21.082 v1(29.527,-21.273)
NetC17_2: C17.2 U1.3 Z2.2 | length 5
  Top Layer w0.25: U1.3 25.775,-3.714 26.314,-3.175 26.317,-3.177 27.147,-3.177 27.674,-2.65 C17.2 27.445,-2.2 Z2.2
NetC18_2: C18.2 U1.4 Z2.1 | length 4.2
  Top Layer w0.25: Z2.1 23.405,-1.498 24.575,-2.667 C18.2 24.855,-2.948 25.275,-3.367 U1.4
NetC23_1: C23.1 Q6.3 Vibro.2 | length 4.2
  Top Layer w0.45: Q6.3 38.608,-19.892 C23.1 40.3,-19.511 Vibro.2@40.715,-19.925
NetC23_2: C23.2 R25.2 Vibro.1 | length 9.1
  Top Layer w0.45: C23.2 38.227,-17.887 38.816,-18.477 39.556,-18.477 39.865,-18.167 41.853,-18.167 43.23,-19.544 Vibro.1@43.615,-19.544 ; R25.2@38.227,-15.134 38.227,-16.748 C23.2@38.259,-16.779
NetC24_1: C24.1 Q2.3 Q7.3 T1.2 T1.4 | length 10.8
  Top Layer w0.5: T1.2 27.3,-21.532 29.05,-19.782 ; T1.4 29.05,-19.782 ; 29.364,-20.096 29.05,-19.782 ; 29.428,-20.096 Q2.3 Q7.3 35.906,-20.096 C24.1@36.004,-20.194
NetC24_2: C24.2 D4.3 R3.2 | length 4.5
  Top Layer w0.25: D4.3 35.398,-14.761 35.398,-16.794 R3.2 C24.2
NetD2_1: D2.1 T1.3 | length 1.7
  Top Layer w0.4: T1.3 27.3,-17.595 D2.1
NetDisplay1_1: Display1.1 U1.42 | length 7.7
  Top Layer w0.25: U1.42 29.303,-8.225 29.909,-7.62 34.227,-7.62 34.393,-7.454 Display1.1@34.393,-6.924
NetDisplay1_2: Display1.2 U1.41 | length 8.5
  Top Layer w0.25: U1.41 29.502,-8.725 30.162,-8.064 34.449,-8.064 34.893,-7.62 Display1.2@34.893,-6.924
NetDisplay1_4: Display1.4 U1.45 | length 10.1
  Top Layer w0.25: U1.45 28.315,-6.725 28.397,-6.643 28.88,-6.643 28.962,-6.725 32.391,-6.725 v1(32.639,-6.477) ; v1(35.56,-7.938) 35.56,-7.784 35.893,-7.451 Display1.4@35.893,-6.924
  Bottom Layer w0.25: v1(32.639,-6.477) 34.369,-6.477 35.56,-7.668 v1(35.56,-7.938)
NetDisplay1_5: Display1.5 U1.39 | length 13.4
  Top Layer w0.25: U1.39 30.235,-9.725 31.686,-11.176 35.877,-11.176 36.393,-10.66 Display1.5@36.393,-6.924
NetKEY1_4: KEY1.4 U1.14 | length 13
  Top Layer w0.25: v1(13.716,-5.842) 13.852,-5.978 14.171,-5.978 14.173,-5.98 14.656,-5.98 14.658,-5.978 14.66,-5.978 14.895,-5.743 20.457,-5.743 U1.14
  Bottom Layer w0.25: KEY1.4@8.387,-7.65 8.989,-7.048 9.728,-7.048 10.557,-6.219 11.592,-6.219 11.969,-5.842 v1(13.716,-5.842)
NetKEY2_4: KEY2.4 U1.13 | length 16.1
  Top Layer w0.25: v1(14.414,-5.397) 14.541,-5.271 19.685,-5.271 20.15,-5.225 U1.13
  Bottom Layer w0.25: KEY2.4@5.478,-7.747 6.409,-6.816 7.596,-6.816 7.914,-6.498 9.709,-6.498 10.39,-5.817 11.425,-5.817 11.927,-5.315 13.419,-5.315 13.475,-5.26 13.957,-5.26 14.013,-5.315 14.332,-5.315 v1(14.414,-5.397)
NetKEY3_4: KEY3.4 U1.16 | length 6.1
  Top Layer w0.25: v1(15.557,-6.858) 16.013,-6.858 16.058,-6.813 16.058,-6.81 16.294,-6.574 17.104,-6.574 17.255,-6.725 U1.16
  Bottom Layer w0.25: KEY3.4@14.95,-7.65 14.95,-7.466 v1(15.557,-6.858)
NetLED1_1: LED1.1 R14.2 | length 2.2
  Top Layer w0.4: v1(1.333,-9.588) 1.333,-10.634 R14.2
  Bottom Layer w0.4: LED1.1@1.333,-10.741 v1(1.333,-9.588)
NetQ1_1: Q1.1 R2.2 R4.2 | length 2.7
  Top Layer w0.25: Q1.1 19.676,-15.994 R2.2 21.017,-16.194 R4.2@21.095,-16.116
NetQ1_3: Q1.3 R5.1 U1.29 | length 11.1
  Top Layer w0.25: R5.1 16.891,-15.419 Q1.3 20.301,-15.494 20.905,-14.889 20.905,-14.644 21.741,-13.808 23.386,-13.808 23.666,-13.529 23.666,-12.633 23.386,-12.354 23.383,-12.354 23.275,-12.246 U1.29
NetQ2_1: Q2.1 R30.1 | length 1.3
  Top Layer w0.3: R30.1@31.686,-17.526 31.869,-17.708 Q2.1
NetQ3_1: Q3.1 R8.1 U1.2 | length 5.6
  Top Layer w0.25: U1.2 26.275,-3.888 26.562,-3.6 28.785,-3.6 29.022,-3.363 Q3.1 29.022,-3.558 29.78,-4.317 R8.1
NetQ5_1: Q5.1 R23.1 | length 2.1
  Top Layer w0.25: Q5.1 16.836,-10.74 17.335,-11.239 17.906,-11.239 R23.1
NetQ5_3: Q5.3 R19.2 Sound2.1 | length 6
  Top Layer w0.25: Sound2.1 14.097,-8.319 15.479,-8.319 15.684,-8.524 15.684,-9.017 16.129,-9.461 17.179,-9.461 Q5.3
  Bottom Layer w0.25: Sound2.1 14.097,-8.826 14.097,-9.757 R19.2
NetQ6_1: Q6.1 R24.2 U1.38 | length 21.3
  Top Layer w0.25: U1.38 30.101,-10.225 31.496,-11.62 36.576,-11.62 36.957,-12.002 R24.2@36.957,-21.971 ; R24.2 37.086,-22.162 Q6.1
NetQ7_1: Q7.1 R29.1 | length 1.3
  Top Layer w0.3: Q7.1 34.345,-17.661 R29.1@34.48,-17.526
NetR6_2: R6.2 R7.2 U1.40 | length 5.7
  Top Layer w0.25: U1.40 29.7,-9.225 30.035,-8.89 R7.2 30.605,-9.46 31.433,-10.287 R6.2
NetR9_1: R9.1 U1.32 | length 23.8
  Top Layer w0.25: R9.1 9.138,-3.288 13.698,-3.288 14.025,-3.615 15.233,-3.615 15.609,-3.992 16.017,-3.992 16.475,-4.45 v2(16.576,-4.45) ; v2(24.451,-12.501) 24.451,-12.376 24.425,-12.35 24.775,-12 U1.32
  Bottom Layer w0.25: v2(16.576,-4.45) 17.693,-5.568 17.693,-10.77 19.073,-12.149 24.1,-12.149 v2(24.451,-12.501)
NetR10_1: R10.1 U1.33 | length 25.3
  Top Layer w0.25: R10.1 8.954,-4.071 9.434,-4.071 9.814,-3.691 13.531,-3.691 13.858,-4.018 15.066,-4.018 15.495,-4.447 15.495,-4.645 15.5,-4.65 15.713,-4.65 v2(15.72,-4.643) ; v2(25.126,-13.126) 25.175,-13.174 25.275,-13.074 U1.33
  Bottom Layer w0.25: v2@15.65,-4.625 15.702,-4.625 v2(15.72,-4.643) 17.291,-6.214 17.291,-11.05 18.792,-12.552 23.615,-12.552 24.191,-13.128 24.711,-13.128 24.739,-13.1 25.15,-13.1 25.15,-13.102 v2(25.126,-13.126)
NetR11_1: R11.1 R12.2 U1.27 | length 4.3
  Top Layer w0.25: R11.1 19.877,-13.081 20.119,-13.322 20.119,-13.386 20.46,-13.727 20.942,-13.727 21.283,-13.386 21.283,-13.324 21.399,-13.208 21.588,-13.208 21.588,-13.132 22.275,-12.445 U1.27
NetR12_1: R12.1 U1.28 | length 1.8
  Top Layer w0.25: U1.28 22.775,-12.995 R12.1@22.988,-13.208
NetR13_2: R13.2 U4.5 | length 2.7
  Top Layer w0.25: R13.2 5.219,-9.331 5.219,-8.814 6.012,-8.021 6.012,-7.463 U4.5
NetR14_1: R14.1 U4.1 | length 3.8
  Top Layer w0.3: R14.1 3.123,-10.277 5.598,-10.277 U4.1
NetR22_2: R22.2 R29.2 R30.2 U1.26 | length 20.1
  Top Layer w0.25: v1(20.701,-13.144) 20.701,-12.7 21.047,-12.354 21.34,-12.354 21.775,-11.919 U1.26 ; v1(31.686,-13.145) 31.761,-13.22 31.761,-16.052 31.686,-16.126 R22.2 R29.2@34.48,-16.126
  Bottom Layer w0.25: v1(20.701,-13.144) 20.701,-13.081 20.828,-12.954 23.368,-12.954 24.392,-13.978 30.091,-13.978 30.935,-13.134 31.42,-13.134 31.422,-13.136 v1@31.689,-13.136 ; v1(31.686,-13.145) 31.686,-13.149 v1@31.759,-13.221
NetR23_2: R23.2 U1.25 | length 1.6
  Top Layer w0.25: R23.2 20.036,-11.525 U1.25
NetR26_1: R26.1 R28.1 U1.46 | length 34.5
  Top Layer w0.25: U1.46 29.145,-6.225 29.4,-5.969 v1(29.4,-5.651)
  Bottom Layer w0.25: R26.1 5.96,-9.335 R28.1 4.572,-9.151 4.572,-6.796 4.955,-6.413 7.429,-6.413 7.747,-6.096 9.542,-6.096 10.223,-5.415 11.258,-5.415 13.879,-2.794 19.621,-2.794 20.511,-3.683 27.877,-3.683 28.258,-4.064 28.258,-5.271 28.639,-5.651 v1(29.4,-5.651)
PUMP: C9.2 D1.3 R27.1 U3.1 U3.3 | length 13.7
  Top Layer w0.2: C9.2@9,-14.05 C9.2@9.325,-14.05
  Top Layer w0.45: D1.3 3.665,-13 4.779,-14.113 v1(6.445,-14.113) 8.937,-14.113 9,-14.05 C9.2@9.15,-13.9 ; C9.2 10.45,-14.1 U3.1 11.325,-14.025 11.7,-14.4 11.7,-15.525 11.25,-15.975 10.575,-15.975 U3.3
  Bottom Layer w0.45: v1(6.445,-14.113) 7.638,-14.113 R27.1
pads on no net: D4.1 J1.4 U1.1 U1.7 U1.10 U1.11 U1.12 U1.15 U1.17 U1.18 U1.19 U1.20 U1.21 U1.22 U1.30 U1.31 Vibro.GND

## Polygon pours and split planes (outlines as drawn)
GND on Top Layer "Top Layer-No Net" (solid, pour order 0): 0,0 43.307,0 43.307,-6.875 45,-6.875 45,-23 21.9,-23 21.9,-17 0,-17 0,0
GND on Bottom Layer "Top Layer-No Net" (solid, pour order 2): 0,0 43.307,0 43.307,-6.875 45,-6.875 45,-23 21.9,-23 21.9,-17 0,-17 0,0

## Keep-outs
Keep-Out Layer:
  lines w0.1: 0,-17 0,0 43.307,0 43.307,-6.875 45,-6.875 45,-23 21.9,-23 21.9,-17 0,-17

## Other copper
Top Layer:
  rectangle net NetC13_2: 29.21,-22.543 30.29,-21.273
  pour cut-out: 22.162,-19.177 22.155,-19.184 22.155,-22.745 22.206,-22.796 27.178,-22.796 27.051,-22.669 27.051,-20.701
  pour cut-out: 21.082,-16.764 21.159,-16.687 21.159,-16.052 21.4,-15.811 23.495,-15.811 23.622,-15.938 23.622,-19.304 22.225,-19.304 22.162,-19.367 22.162,-16.764 21.971,-16.764 21.78,-16.954

## Silkscreen, mask and mechanical layers (free items; w line width, h text height)
Bottom Overlay:
  text "Дозиметр Ультра-Микрон" at 40.784,-1.427 h1.5
  text "ver.4.06 lite" at 36.029,-3.121 h1.5
  text "Авторы:" at 35.306,-5.397 h1.5
  text "Shodan" at 35.073,-7.396 h1.5
  text "Тула 2014-15г." at 35.496,-22.352 h1.5